# EAGLE board final (EAGLE 5.01)
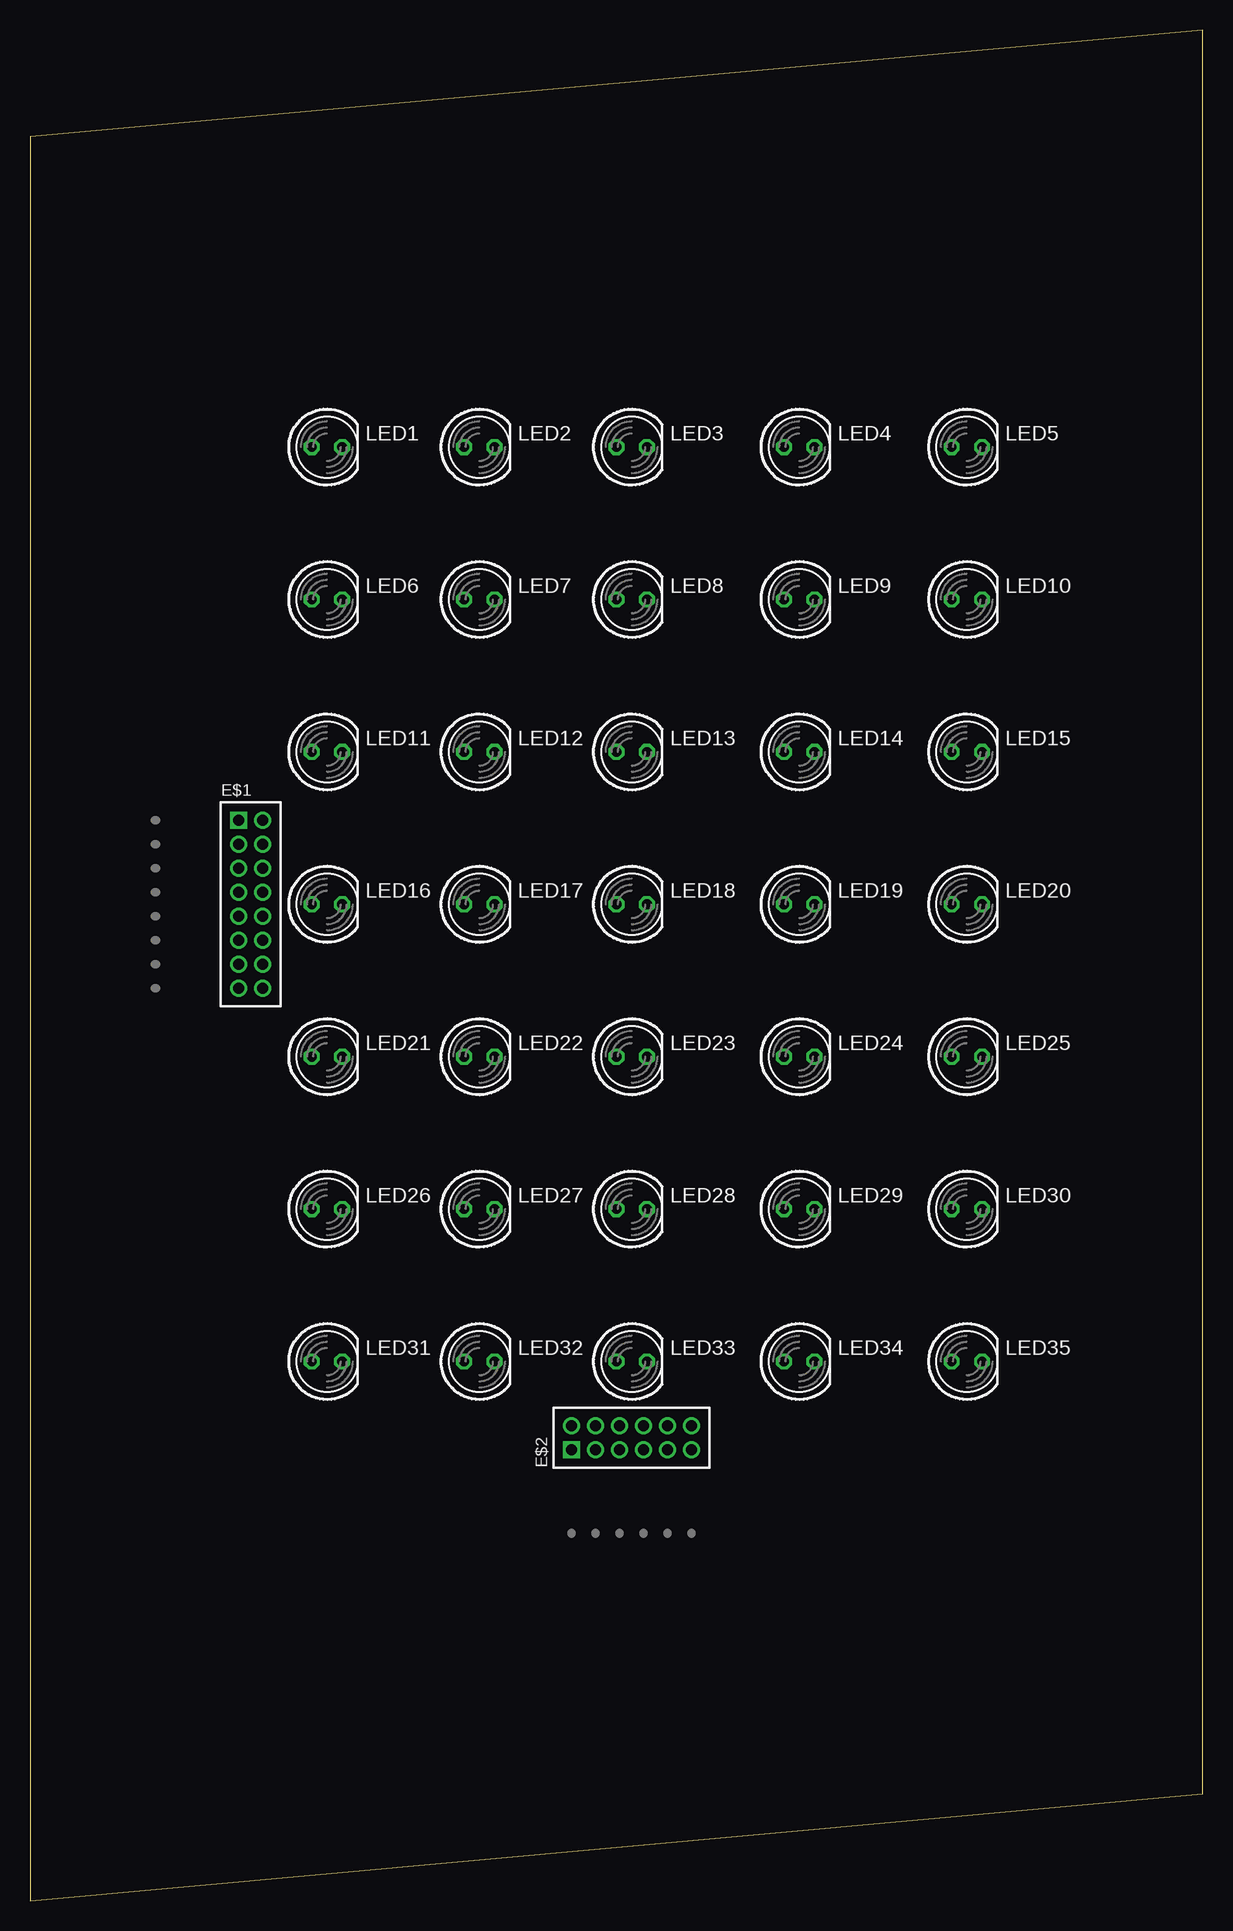
[diagram p0: board, top side]
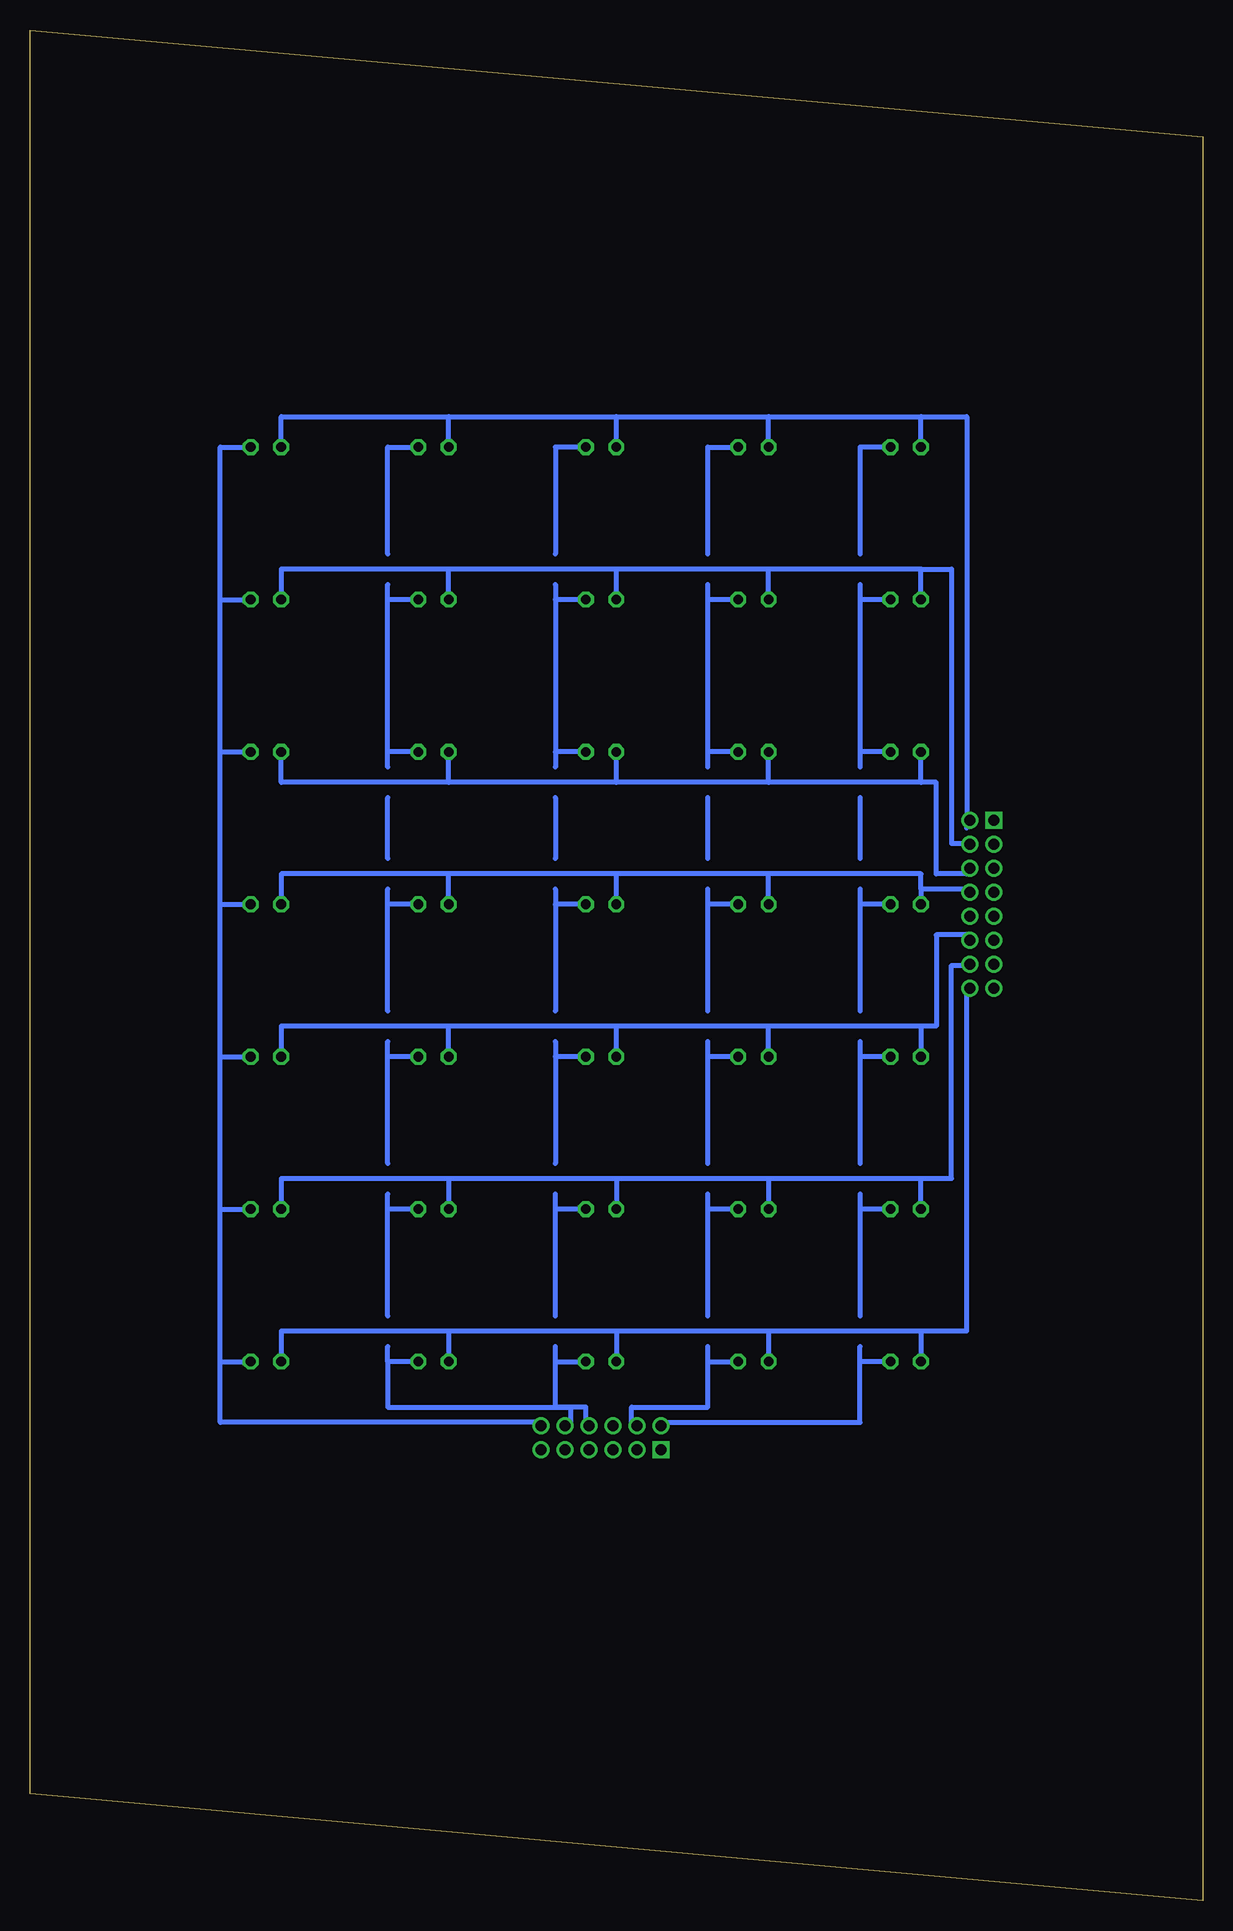
[diagram p1: board, bottom side, seen from below]

Size 97.77 x 155.88 mm. Coordinates in mm from the lower left corner, seen from the top.
Outline: 0,0 97.77,8.89 97.77,155.88 0,146.99 0,0
Copper layers (1*16): Top 0.035mm / dielectric 1.5mm / Bottom 0.035mm
Design rules "default *": minimum track width 10mil, minimum drill 24mil, track to track 8mil, track to pad 8mil, pad to pad 8mil, via to via 8mil, smd to smd 8mil, copper to edge 40mil, drill to drill 8mil, minimum pad ring 10mil, minimum via ring 8mil, stop-mask expansion 4mil, vias tented up to drill 0mil, thermal gap 10mil

## Footprints (pad centres in the part's own frame; a part is rotated, then mirrored left to right if it is on the bottom)
87760-16 = drill 0.914 square: 1 -7,-1 | drill 0.914 round: 2 -7,1; 3 -5,-1; 4 -5,1; 5 -3,-1; 6 -3,1; 7 -1,-1; 8 -1,1; 9 1,-1; 10 1,1; 11 3,-1; 12 3,1; 13 5,-1; 14 5,1; 15 7,-1; 16 7,1
87760-12 = drill 0.914 square: 1 -5,-1 | drill 0.914 round: 2 -5,1; 3 -3,-1; 4 -3,1; 5 -1,-1; 6 -1,1; 7 1,-1; 8 1,1; 9 3,-1; 10 3,1; 11 5,-1; 12 5,1
LED5MM = drill 0.813 octagon: A -1.27,0; K 1.27,0

## Placement (x,y rotation side)
E$1  [87760-16]  18.41,83.02 270 top
E$2  [87760-12]  50.16,38.57 0 top
LED1  [LED5MM]  24.76,121.12 0 top
LED2  [LED5MM]  37.46,121.12 0 top
LED3  [LED5MM]  50.16,121.12 0 top
LED4  [LED5MM]  64.13,121.12 0 top
LED5  [LED5MM]  78.1,121.12 0 top
LED6  [LED5MM]  24.76,108.42 0 top
LED7  [LED5MM]  37.46,108.42 0 top
LED8  [LED5MM]  50.16,108.42 0 top
LED9  [LED5MM]  64.13,108.42 0 top
LED10  [LED5MM]  78.1,108.42 0 top
LED11  [LED5MM]  24.76,95.72 0 top
LED12  [LED5MM]  37.46,95.72 0 top
LED13  [LED5MM]  50.16,95.72 0 top
LED14  [LED5MM]  64.13,95.72 0 top
LED15  [LED5MM]  78.1,95.72 0 top
LED16  [LED5MM]  24.76,83.02 0 top
LED17  [LED5MM]  37.46,83.02 0 top
LED18  [LED5MM]  50.16,83.02 0 top
LED19  [LED5MM]  64.13,83.02 0 top
LED20  [LED5MM]  78.1,83.02 0 top
LED21  [LED5MM]  24.76,70.32 0 top
LED22  [LED5MM]  37.46,70.32 0 top
LED23  [LED5MM]  50.16,70.32 0 top
LED24  [LED5MM]  64.13,70.32 0 top
LED25  [LED5MM]  78.1,70.32 0 top
LED26  [LED5MM]  24.76,57.62 0 top
LED27  [LED5MM]  37.46,57.62 0 top
LED28  [LED5MM]  50.16,57.62 0 top
LED29  [LED5MM]  64.13,57.62 0 top
LED30  [LED5MM]  78.1,57.62 0 top
LED31  [LED5MM]  24.76,44.92 0 top
LED32  [LED5MM]  37.46,44.92 0 top
LED33  [LED5MM]  50.16,44.92 0 top
LED34  [LED5MM]  64.13,44.92 0 top
LED35  [LED5MM]  78.1,44.92 0 top

## Library data of the parts
E$1 E$2 = con-molex-milli-grid
LED1-LED35 = led

## Nets
S$1: LED1.K
S$2: LED6.A LED7.A LED8.A LED9.A LED10.A
S$3: LED5.K LED10.K LED15.K LED20.K LED25.K LED30.K LED35.K
S$4: LED16.A LED17.A LED18.A LED19.A LED20.A
S$5: LED31.A LED32.A LED33.A LED34.A LED35.A
S$6: LED26.A LED27.A LED28.A LED29.A LED30.A
S$7: LED21.A LED22.A LED23.A LED24.A LED25.A
S$8: LED31.K
S$9: LED32.K
S$10: LED11.A LED12.A LED13.A LED14.A LED15.A
S$11: LED34.K
S$12: LED33.K
S$13: LED1.A LED2.A LED3.A LED4.A LED5.A
S$14: LED6.K LED11.K
S$16: LED16.K
S$17: LED21.K
S$18: LED26.K
S$19: LED27.K
S$20: LED22.K
S$21: LED17.K
S$23: LED7.K LED12.K
S$24: LED2.K
S$25: LED3.K
S$26: LED8.K LED13.K
S$28: LED18.K
S$29: LED23.K
S$30: LED28.K
S$31: LED29.K
S$32: LED24.K
S$33: LED19.K
S$35: LED9.K LED14.K
S$36: LED4.K

## Tracks (layer width: path | path; a pad name or v marks a point on that pad's centre or on a via)
S$1
  Bottom 0.406: LED1.K 28.57,121.12 28.57,112.23
S$2
  Bottom 0.406: LED6.A 23.49,110.96 | 23.49,110.96 20.95,110.96 20.95,88.1 19.68,88.1 | 23.49,110.96 36.19,110.96 | 36.19,110.96 48.89,110.96 | 48.89,110.96 62.86,110.96 | 62.86,110.96 76.83,110.96 LED10.A | LED9.A 62.86,110.96 | LED8.A 48.89,110.96 | LED7.A 36.19,110.96
S$3
  Bottom 0.406: LED5.K 81.91,121.12 81.91,108.42 | 81.91,108.42 LED10.K | 81.91,95.72 81.91,108.42 | 81.91,95.72 LED15.K | 81.91,83.02 81.91,95.72 | 81.91,83.02 LED20.K | 81.91,70.32 81.91,83.02 | 81.91,70.32 LED25.K | 81.91,57.62 81.91,70.32 | 81.91,57.62 LED30.K | 81.91,44.92 LED35.K | 81.91,44.92 81.91,57.62 | 81.91,44.92 81.91,39.84 55.24,39.84
S$4
  Bottom 0.406: 19.68,84.29 23.49,84.29 | 23.49,84.29 LED16.A | 23.49,84.29 23.49,85.56 36.19,85.56 | 36.19,85.56 48.89,85.56 | 48.89,85.56 62.86,85.56 | 62.86,85.56 76.83,85.56 LED20.A | LED19.A 62.86,85.56 | LED18.A 48.89,85.56 | LED17.A 36.19,85.56
S$5
  Bottom 0.406: 19.68,75.4 19.68,47.46 23.49,47.46 | 23.49,47.46 LED31.A | 23.49,47.46 36.19,47.46 | 36.19,47.46 48.89,47.46 | 48.89,47.46 62.86,47.46 | 62.86,47.46 76.83,47.46 LED35.A | 62.86,47.46 LED34.A | 48.89,47.46 LED33.A | 36.19,47.46 LED32.A
S$6
  Bottom 0.406: LED30.A 76.83,60.16 62.86,60.16 | 62.86,60.16 LED29.A | 48.89,60.16 62.86,60.16 | 48.89,60.16 LED28.A | 36.19,60.16 48.89,60.16 | 36.19,60.16 LED27.A | 19.68,77.94 20.95,77.94 20.95,60.16 23.49,60.16 | 23.49,60.16 36.19,60.16 | LED26.A 23.49,60.16
S$7
  Bottom 0.406: 19.68,80.48 22.22,80.48 22.22,72.86 23.49,72.86 | 23.49,72.86 LED21.A | 23.49,72.86 36.19,72.86 | 36.19,72.86 48.89,72.86 | 48.89,72.86 62.86,72.86 | 62.86,72.86 76.83,72.86 LED25.A | LED24.A 62.86,72.86 | LED23.A 48.89,72.86 | LED22.A 36.19,72.86
S$8
  Bottom 0.406: LED31.K 28.57,44.92 | 45.08,39.84 28.57,39.84 28.57,44.92 | 28.57,44.92 28.57,46.19
S$9
  Bottom 0.406: 47.62,39.84 47.62,41.11 41.27,41.11 41.27,44.92 | 41.27,44.92 LED32.K | 41.27,44.92 41.27,46.19
S$10
  Bottom 0.406: 23.49,93.18 LED11.A | 23.49,93.18 36.19,93.18 | 36.19,93.18 48.89,93.18 | 48.89,93.18 62.86,93.18 | 62.86,93.18 76.83,93.18 LED15.A | 23.49,93.18 22.22,93.18 22.22,85.56 19.68,85.56 | 36.19,93.18 LED12.A | 48.89,93.18 LED13.A | 62.86,93.18 LED14.A
S$11
  Bottom 0.406: LED34.K 67.94,44.92 | 67.94,44.92 67.94,41.11 52.7,41.11 52.7,39.84 | 67.94,44.92 67.94,46.19
S$12
  Bottom 0.406: 51.43,39.84 51.43,41.11 53.97,41.11 53.97,44.92 | 53.97,44.92 LED33.K | 53.97,44.92 53.97,46.19
S$13
  Bottom 0.406: LED5.A 76.83,123.66 62.86,123.66 | LED1.A 23.49,123.66 | 23.49,123.66 19.68,123.66 19.68,89.37 | 62.86,123.66 48.89,123.66 | 48.89,123.66 36.19,123.66 | 36.19,123.66 23.49,123.66 | LED2.A 36.19,123.66 | LED3.A 48.89,123.66 | LED4.A 62.86,123.66
S$14
  Bottom 0.406: 28.57,109.69 28.57,108.42 | 28.57,108.42 28.57,95.72 | 28.57,95.72 28.57,94.45 | LED6.K 28.57,108.42 | LED11.K 28.57,95.72
S$15
  Bottom 0.406: 28.57,91.91 28.57,86.83
S$16
  Bottom 0.406: 28.57,84.29 28.57,83.02 | 28.57,83.02 28.57,74.13 | LED16.K 28.57,83.02
S$17
  Bottom 0.406: 28.57,71.59 28.57,70.32 | 28.57,70.32 28.57,61.43 | LED21.K 28.57,70.32
S$18
  Bottom 0.406: 28.57,58.89 28.57,57.62 | 28.57,57.62 28.57,48.73 | LED26.K 28.57,57.62
S$19
  Bottom 0.406: 41.27,48.73 41.27,57.62 | 41.27,57.62 41.27,58.89 | LED27.K 41.27,57.62
S$20
  Bottom 0.406: 41.27,61.43 41.27,70.32 | 41.27,70.32 41.27,71.59 | LED22.K 41.27,70.32
S$21
  Bottom 0.406: 41.27,74.13 41.27,83.02 | 41.27,83.02 41.27,84.29 | LED17.K 41.27,83.02
S$22
  Bottom 0.406: 41.27,86.83 41.27,91.91
S$23
  Bottom 0.406: 41.27,94.45 41.27,95.72 | 41.27,95.72 41.27,108.42 | 41.27,108.42 41.27,109.69 | LED12.K 41.27,95.72 | LED7.K 41.27,108.42
S$24
  Bottom 0.406: 41.27,112.23 41.27,121.12 LED2.K
S$25
  Bottom 0.406: LED3.K 53.97,121.12 53.97,112.23
S$26
  Bottom 0.406: 53.97,109.69 53.97,108.42 | 53.97,108.42 53.97,95.72 | 53.97,95.72 53.97,94.45 | LED8.K 53.97,108.42 | LED13.K 53.97,95.72
S$27
  Bottom 0.406: 53.97,91.91 53.97,86.83
S$28
  Bottom 0.406: 53.97,84.29 53.97,83.02 | 53.97,83.02 53.97,74.13 | LED18.K 53.97,83.02
S$29
  Bottom 0.406: 53.97,71.59 53.97,70.32 | 53.97,70.32 53.97,61.43 | LED23.K 53.97,70.32
S$30
  Bottom 0.406: 53.97,48.73 53.97,57.62 | 53.97,57.62 53.97,58.89 | LED28.K 53.97,57.62
S$31
  Bottom 0.406: 67.94,48.73 67.94,57.62 | 67.94,57.62 67.94,58.89 | LED29.K 67.94,57.62
S$32
  Bottom 0.406: 67.94,61.43 67.94,70.32 | 67.94,70.32 67.94,71.59 | LED24.K 67.94,70.32
S$33
  Bottom 0.406: 67.94,74.13 67.94,83.02 | 67.94,83.02 67.94,84.29 | LED19.K 67.94,83.02
S$34
  Bottom 0.406: 67.94,86.83 67.94,91.91
S$35
  Bottom 0.406: 67.94,94.45 67.94,95.72 | 67.94,95.72 67.94,108.42 | 67.94,108.42 67.94,109.69 | LED9.K 67.94,108.42 | LED14.K 67.94,95.72
S$36
  Bottom 0.406: 67.94,112.23 67.94,121.12 LED4.K